# Altium PCB PCB1.PcbDoc (part 1 of 2)
Units mm, origin at the board's own origin, x right, y up, seen from the top; angles counter-clockwise.
Board outline 124.21 x 71.38 mm, 4 copper layers (Top Layer, Int1 (GND), Int2 (PWR), Bottom Layer), stack 1.369 mm thick; 127 components, 91 nets, 539 pads, 880 vias.
Unrouted connection lines stored in the file: 8.
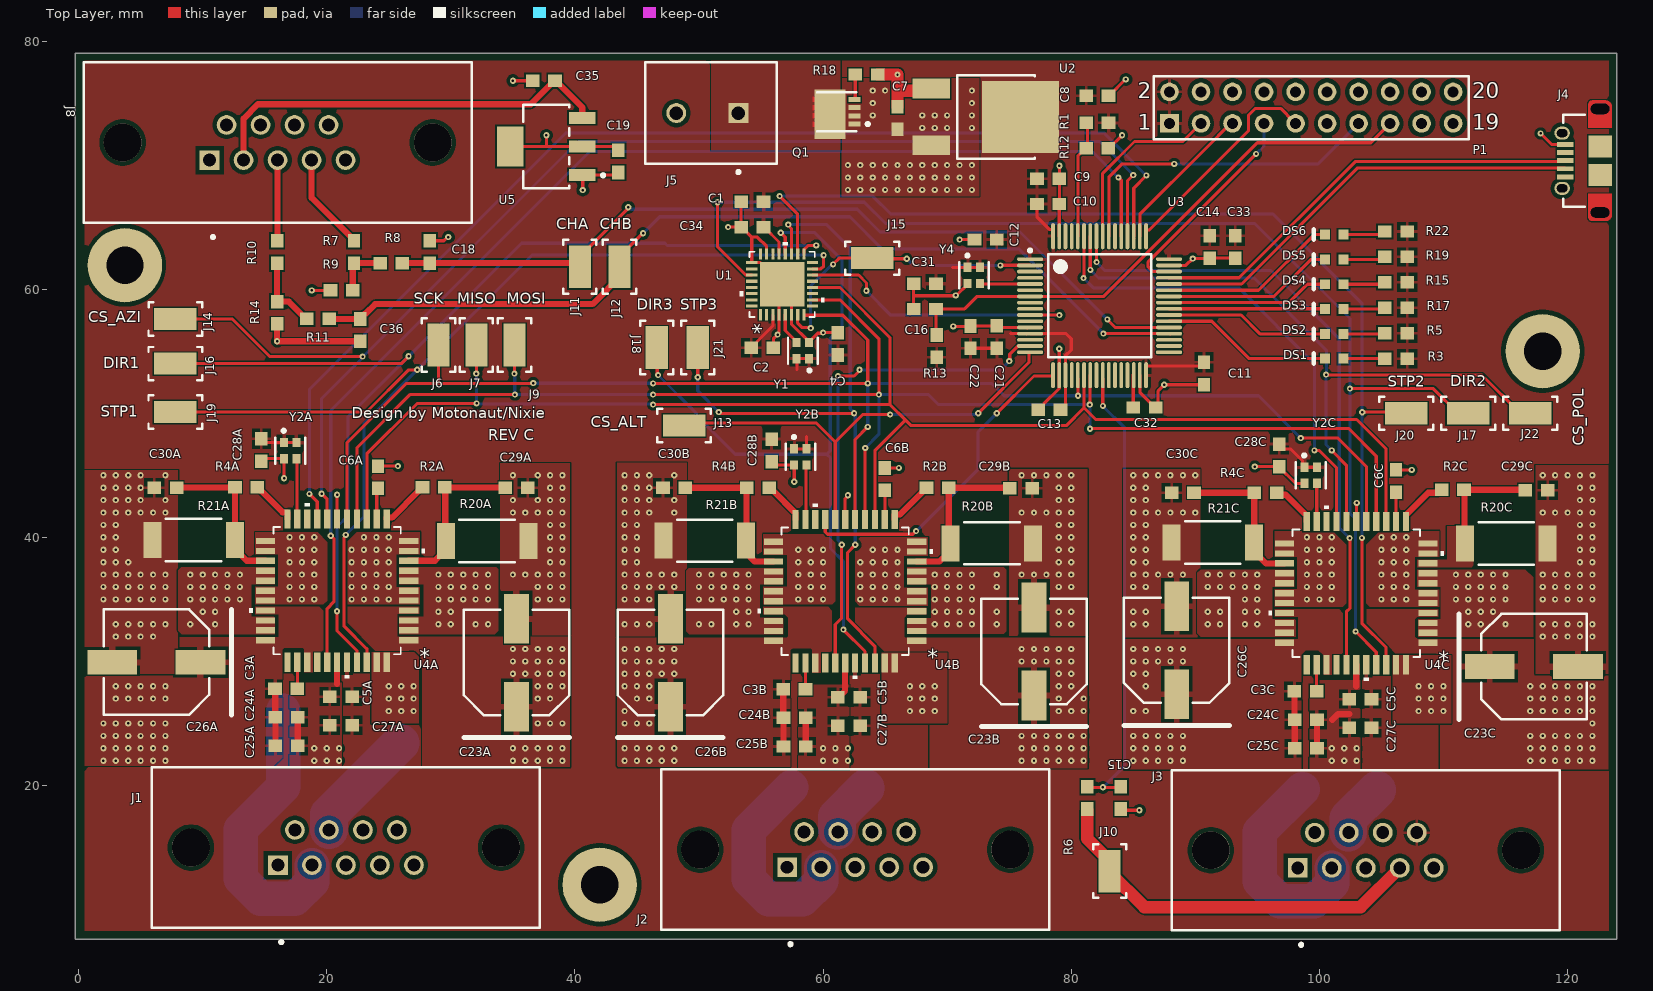
[diagram p0: Top Layer view]
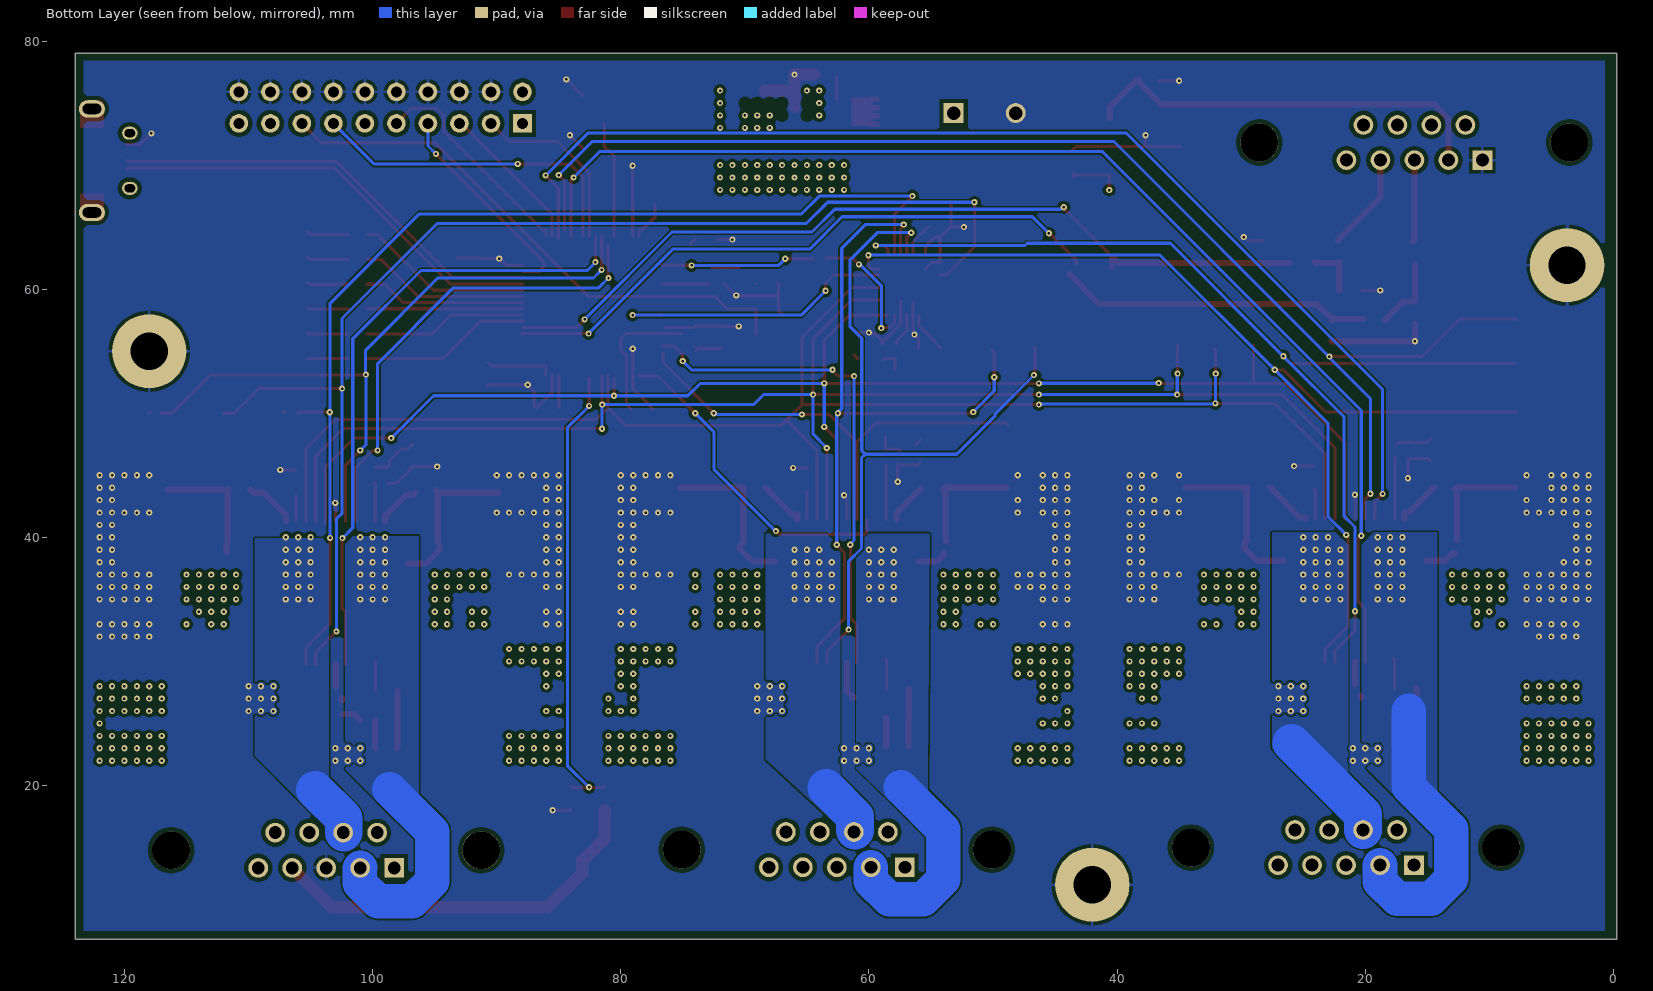
[diagram p1: Bottom Layer view, seen from below]
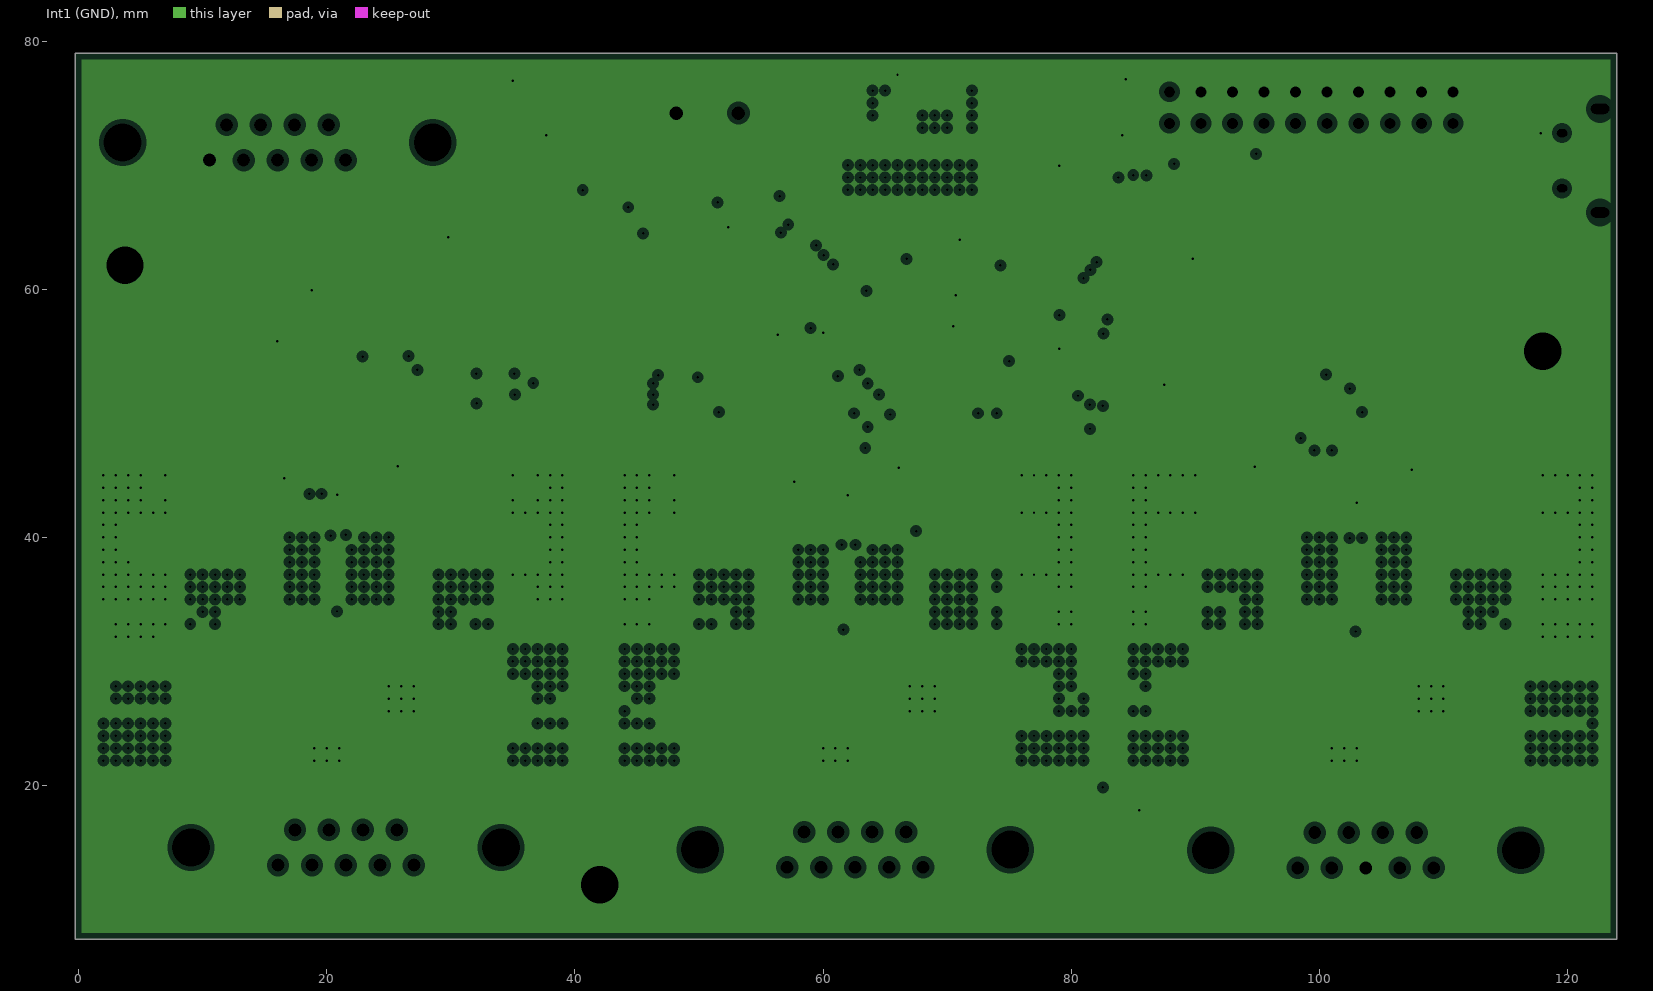
[diagram p2: Int1 (GND), clearances drawn from the general rule]
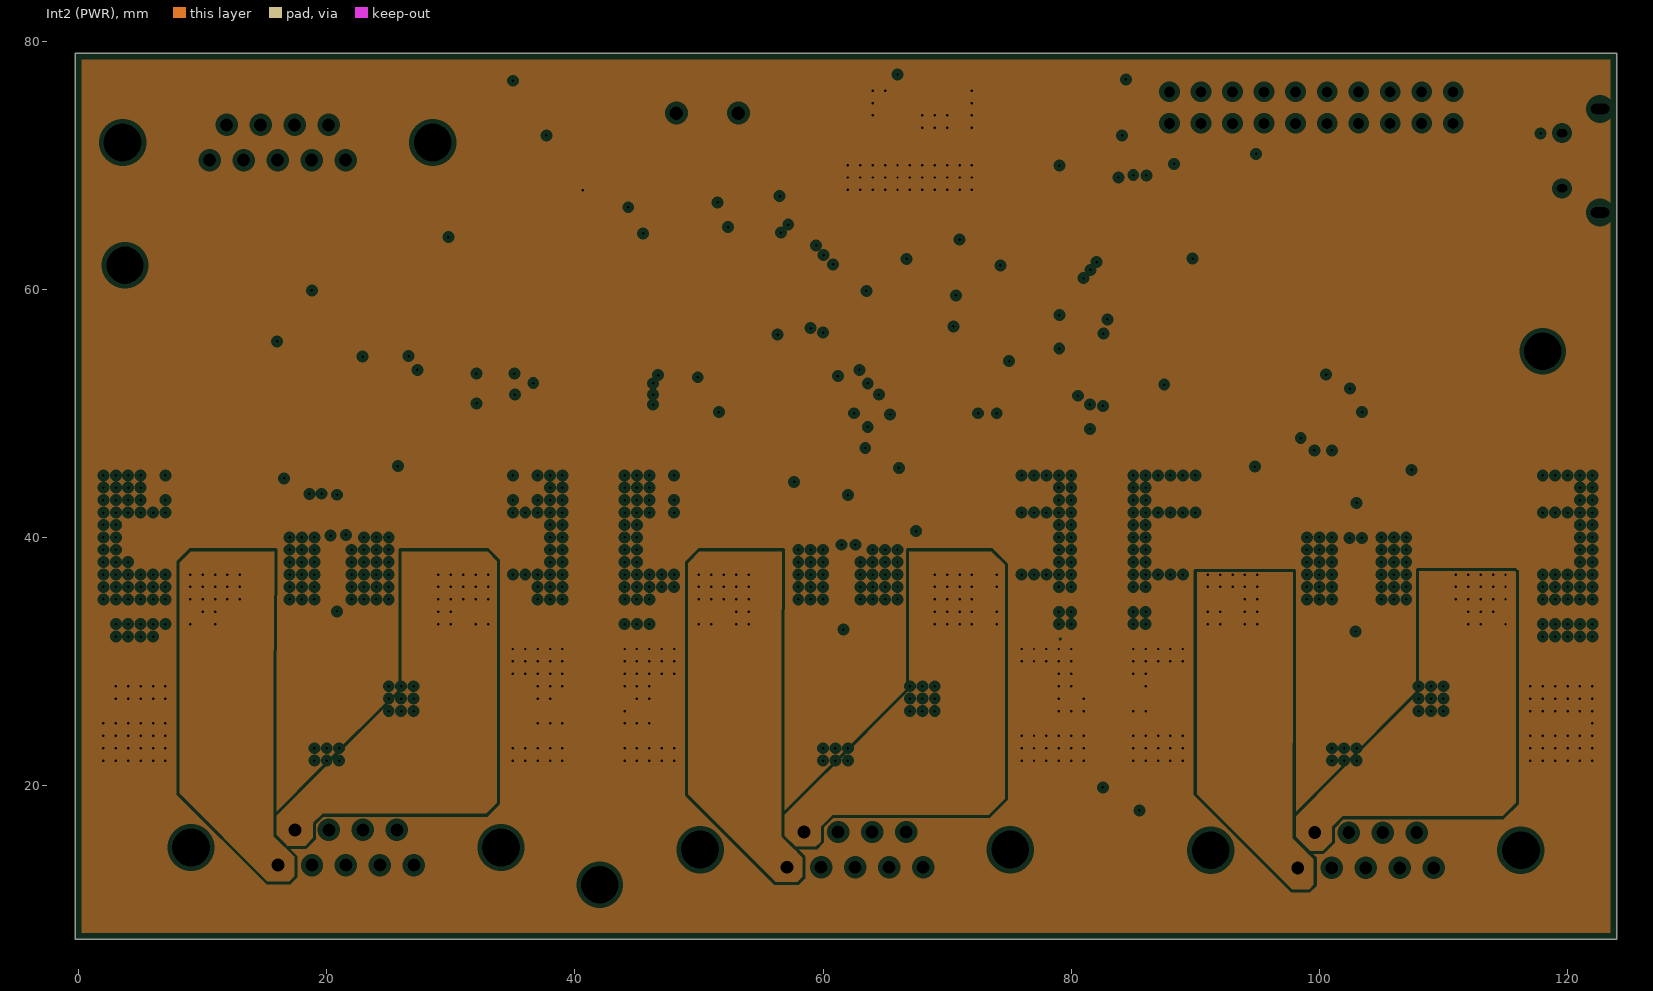
[diagram p3: Int2 (PWR), clearances drawn from the general rule]
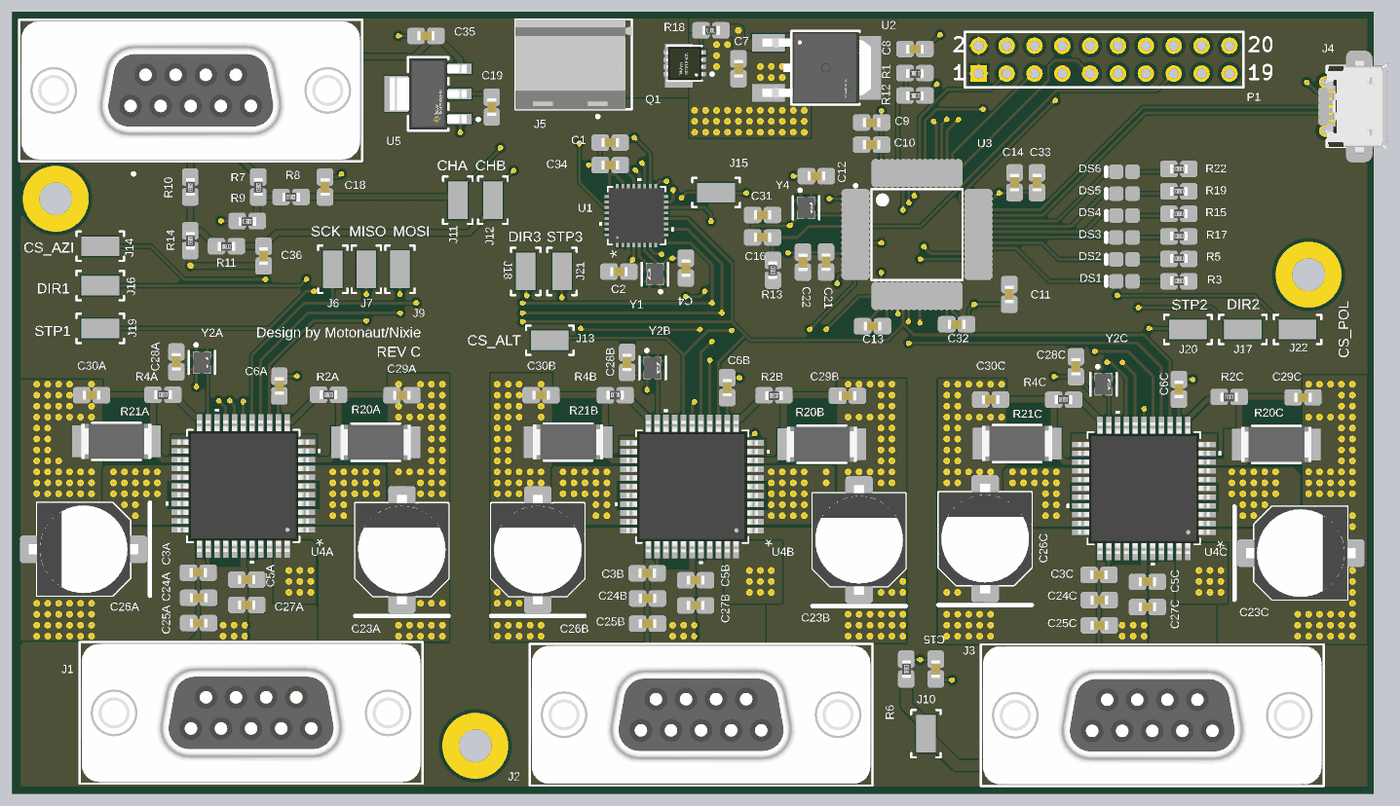
[diagram p5: 3D render of the assembled board from above, using the file's embedded part models]

## Layer stack, top to bottom
Top Solder: solder mask 0.0254, SM-001, Dk 4
Top Layer: signal copper 0.035
Dielectric 1: prepreg 0.1295, PP-017, Dk 4.3
Dielectric 2: prepreg 0.1295, PP-017, Dk 4.3
Int1 (GND): plane copper 0.035, net GND
Dielectric 3: core 0.7112, Core-039, Dk 4.8
Int2 (PWR): plane copper 0.035, net (Multiple Nets)
Dielectric 4: prepreg 0.1295, PP-017, Dk 4.3
Dielectric 5: prepreg 0.1295, PP-017, Dk 4.3
Bottom Layer: signal copper 0.035
Bottom Solder: solder mask 0.0254, SM-001, Dk 4

## Board outline
-0.254,7.62 123.952,7.62 123.952,79 -0.254,79

## Design rules (kind name [scope] priority, off if disabled: settings)
AcuteAngle [All] p1: minimum=6.00000000000000E+0001 checktracksonly=FALSE
Clearance [All] p1: gap=0.127 ignorepadtopadclearanceinfootprint=FALSE except(0.1: Arc-Arc Arc-Track Track-Track; 0.15: Arc-Text Track-Text SMDPad-Text THPad-Text Via-Text Fill-Text Poly-Text Region-Text Text-Text; 0.2: Arc-SMDPad Track-SMDPad; 0.254: Arc-Via Arc-Hole Track-Via Track-Hole SMDPad-THPad SMDPad-Via SMDPad-Hole Via-Via Via-Fill Via-Poly Via-Region Fill-Hole Poly-Hole Region-Hole Text-Hole; 0.33: Arc-THPad Track-THPad THPad-Via THPad-Fill THPad-Poly THPad-Region; 0.5: THPad-THPad THPad-Hole Via-Hole)
ComponentClearance [All] p1: gap=0 collisioncheckmode=3 verticalgap=0.254 showdistances=FALSE
DiffPairsRouting [All] p1: maxlimit=0.254 minlimit=0.254 mostfreqgap=0.254 toplayer_minwidth=0.254 toplayer_maxwidth=0.254 toplayer_prefwidth=0.254 bottomlayer_minwidth=0.254 bottomlayer_maxwidth=0.254 bottomlayer_prefwidth=0.254 maxuncoupledlength=12.7
HoleSize [All] p1: absolutevalues=TRUE maxlimit=7.62 minlimit=0.2 maxpercent=80.000 minpercent=20.000
MaxMinImpedance [InNetClass('USB')] p1: minimum=73,00 maximum=103,0
MinimumAnnularRing "MinimumAnnularRing Via" [IsVia] p1: minimumring=0.13
MinimumAnnularRing [All] p2: minimumring=0.3
MinimumSolderMaskSliver [All] p1: minsoldermaskwidth=0.2
PasteMaskExpansion [All] p1 off: expansion=0.254
PlaneClearance [All] p1: clearance=0.381
PlaneConnect [All] p1: pad.planeconnectstyle=Relief pad.reliefexpansion=0.508 pad.reliefentries=4 pad.reliefconductorwidth=0.254 pad.reliefairgap=0.254 via.planeconnectstyle=Direct via.reliefexpansion=0.508 via.reliefentries=4 via.reliefconductorwidth=0.254 via.reliefairgap=0.254
PolygonConnect [All] p1: thpad.connectstyle=Relief thpad.reliefconductorwidth=0.254 thpad.reliefentries=4 thpad.polygonreliefangle="90 Angle" thpad.airgapwidth=0.254 smdpad.connectstyle=Relief smdpad.reliefconductorwidth=0.254 smdpad.reliefentries=4 smdpad.polygonreliefangle="90 Angle" smdpad.airgapwidth=0.254 via.connectstyle=Direct via.reliefconductorwidth=0.254 via.reliefentries=4 via.polygonreliefangle="90 Angle" via.airgapwidth=0.254
RoomDefinition DRV3 [InComponentClass('DRV3')] p1 off: confinementstyle=ConfineIn formatcopy=TRUE lockcomponents=FALSE outline -189.586,-112.446 -138.786,-112.446 -138.786,-87.046 -189.586,-87.046
RoomDefinition DRV2 [InComponentClass('DRV2')] p2 off: confinementstyle=ConfineIn formatcopy=TRUE lockcomponents=FALSE outline -189.586,-112.446 -138.786,-112.446 -138.786,-87.046 -189.586,-87.046
RoomDefinition DRV1 [InComponentClass('DRV1')] p3 off: confinementstyle=ConfineIn formatcopy=TRUE lockcomponents=FALSE outline -189.586,-112.446 -138.786,-112.446 -138.786,-87.046 -189.586,-87.046
RoomDefinition Main [InComponentClass('Main')] p4 off: confinementstyle=ConfineIn formatcopy=TRUE lockcomponents=FALSE outline -189.586,-112.446 -138.786,-112.446 -138.786,-87.046 -189.586,-87.046
RoutingVias [All] p1: holewidth=0.25 width=0.5 viastyle="Through Hole" minholewidth=0.2 minwidth=0.5 maxholewidth=0.5 maxwidth=1
SMDNeckDown [All] p1: percent=100.000
SilkToSilkClearance [All] p1: silktosilkclearance=0.13
SilkToSolderMaskClearance SilkscreenOverComponentPads [IsPad] p1: minsilkscreentomaskgap=0.13 clearancetoexposedcopper=TRUE
SolderMaskExpansion [All] p1: expansion=0.05 istentingtop=FALSE
UnConnectedPin [All] p1 off:
UnRoutedNet [All] p1: checkbadconnections=TRUE
Width Width_1 [InNetClass('USB')] p1: maxlimit=0.097 minlimit=0.097 preferedwidth=0.097 impedanceprofiledriven=TRUE impedanceprofileid={384F65A2-4E45-46CB-9D77-96E8ADE9A7B7} impedanceprofilevalue=90.000000 minimp=50.000000 maximp=50.000000 favimp=50.000000
Width [All] p2: maxlimit=5 minlimit=0.254 preferedwidth=0.254 minimp=50.000000 maximp=50.000000 favimp=50.000000
20 further rules are at their usual default settings.

## Classes and differential pairs
net class USB: USB_D_N USB_D_P
differential pair class USB: USB_D
channel class Stepper-driver: DRV1 DRV2 DRV3
net class Power: NetJ1_1
net class Motor: NetJ1_1 NetJ1_2 NetJ1_6 NetJ1_7 NetJ2_1 NetJ2_2 NetJ2_6 NetJ2_7 NetJ3_1 NetJ3_2 NetJ3_6 NetJ3_7
component class Main: C1 C2 C4 C7 C8 C9 C10 C11 C12 C13 C14 C15 C16 C18 C19 C21 C22 C31 C32 C33 C34 C35 C36 DS1 DS2 DS3 DS4 DS5 DS6 J1 J2 J3 J4 J5 J6 J7 J8 J9 J10 J11 J12 J13 J14 J15 J16 J17 J18 J19 J20 J21 J22 P1 Q1 R1 R3 R5 R6 R7 R8 R9 R10 R11 R12 R13 R14 R15 R17 R18 R19 R22 U1 U2 U3 U5 Y1 Y4
component class DRV3: C3C C5C C6C C23C C24C C25C C26C C27C C28C C29C C30C R2C R4C R20C R21C U4C Y2C
component class DRV2: C3B C5B C6B C23B C24B C25B C26B C27B C28B C29B C30B R2B R4B R20B R21B U4B Y2B
component class DRV1: C3A C5A C6A C23A C24A C25A C26A C27A C28A C29A C30A R2A R4A R20A R21A U4A Y2A
differential pair USB_D: +USB_D_P -USB_D_N

## Components (designator, comment, footprint, x,y, rotation, side; value= is the part's Value field where it differs from the comment)
C1 "Cap SMD" "C0603 (1608)" 54.3,67.05 r0 top value=1uF
C2 "Cap SMD" "C0603 (1608)" 55.1,55.28 r180 top value=100nF
C3A "Cap SMD" "C0603 (1608)" 16.734,27.803 r0 top value=100nF (schematic designator C3)
C3B "Cap SMD" "C0603 (1608)" 57.679,27.752 r0 top value=100nF (schematic designator C3)
C3C "Cap SMD" "C0603 (1608)" 98.878,27.599 r0 top value=100nF (schematic designator C3)
C4 "Cap SMD" "C0603 (1608)" 61.2,55.6 r270 top value=100nF
C5A "Cap SMD" "C0603 (1608)" 21.152,27.163 r0 top value=100nF (schematic designator C5)
C5B "Cap SMD" "C0603 (1608)" 62.097,27.112 r0 top value=100nF (schematic designator C5)
C5C "Cap SMD" "C0603 (1608)" 103.295,26.96 r0 top value=100nF (schematic designator C5)
C6A "Cap SMD" "C0603 (1608)" 24.13,44.842 r270 top value=470nF (schematic designator C6)
C6B "Cap SMD" "C0603 (1608)" 64.973,44.691 r270 top value=470nF (schematic designator C6)
C6C "Cap SMD" "C0603 (1608)" 106.172,44.538 r270 top value=470nF (schematic designator C6)
C7 "Cap SMD" "C0603 (1608)" 66,73.8 r270 top value=22uF
C8 "Cap SMD" "C0603 (1608)" 82.1,75.6 r180 top value=22uF
C9 "Cap SMD" "C0603 (1608)" 78.148,68.898 r180 top value=4.7uF
C10 "Cap SMD" "C0603 (1608)" 78.148,66.867 r180 top value=100nF
C11 "Cap SMD" "C0603 (1608)" 90.7,53.2 r90 top value=100nF
C12 "Cap SMD" "C0603 (1608)" 73.1,64 r0 top value=100nF
C13 "Cap SMD" "C0603 (1608)" 78.232,50.292 r0 top value=100nF
C14 "Cap SMD" "C0603 (1608)" 91.178,63.4 r90 top value=100nF
C15 "Cap SMD" "C0603 (1608)" 84,19 r90 top value=3nF
C16 "Cap SMD" "C0603 (1608)" 68.199,58.402 r0 top value=100nF
C18 "Cap SMD" "C0603 (1608)" 28.3,63 r270 top value=100nF
C19 "Cap SMD" "C0603 (1608)" 43.5,70.3 r270 top value=100nF
C21 "Cap SMD" "C0603 (1608)" 73.987,56.148 r270 top value=100nF
C22 "Cap SMD" "C0603 (1608)" 71.882,56.134 r270 top value=1uF
C23A "EEEFK1C471P" PNSC-FK-V-F_V 35.3,29.9 r90 top (schematic designator C23)
C23B "EEEFK1C471P" PNSC-FK-V-F_V 77,30.8 r90 top (schematic designator C23)
C23C "EEEFK1C471P" PNSC-FK-V-F_V 117.289,29.585 r0 top (schematic designator C23)
C24A "Cap SMD" "C0603 (1608)" 16.764,25.498 r0 top value=1uF (schematic designator C24)
C24B "Cap SMD" "C0603 (1608)" 57.709,25.448 r0 top value=1uF (schematic designator C24)
C24C "Cap SMD" "C0603 (1608)" 98.908,25.295 r0 top value=1uF (schematic designator C24)
C25A "Cap SMD" "C0603 (1608)" 16.764,23.194 r0 top value=100nF (schematic designator C25)
C25B "Cap SMD" "C0603 (1608)" 57.709,23.143 r0 top value=100nF (schematic designator C25)
C25C "Cap SMD" "C0603 (1608)" 98.908,22.991 r0 top value=100nF (schematic designator C25)
C26A "EEEFK1C471P" PNSC-FK-V-F_V 6.277,29.935 r180 top (schematic designator C26)
C26B "EEEFK1C471P" PNSC-FK-V-F_V 47.7,29.9 r90 top (schematic designator C26)
C26C "EEEFK1C471P" PNSC-FK-V-F_V 88.5,30.9 r90 top (schematic designator C26)
C27A "Cap SMD" "C0603 (1608)" 21.152,24.859 r0 top value=1uF (schematic designator C27)
C27B "Cap SMD" "C0603 (1608)" 62.097,24.808 r0 top value=1uF (schematic designator C27)
C27C "Cap SMD" "C0603 (1608)" 103.295,24.655 r0 top value=1uF (schematic designator C27)
C28A "Cap SMD" "C0603 (1608)" 14.732,47.044 r90 top value=100nF (schematic designator C28)
C28B "Cap SMD" "C0603 (1608)" 55.849,46.993 r90 top value=100nF (schematic designator C28)
C28C "Cap SMD" "C0603 (1608)" 96.774,46.598 r90 top value=100nF (schematic designator C28)
C29A "Cap SMD" "C0603 (1608)" 35.3,44 r180 top value=470nF (schematic designator C29)
C29B "Cap SMD" "C0603 (1608)" 75.946,43.942 r180 top value=470nF (schematic designator C29)
C29C "Cap SMD" "C0603 (1608)" 117.5,43.8 r180 top value=470nF (schematic designator C29)
C30A "Cap SMD" "C0603 (1608)" 7,44 r0 top value=470nF (schematic designator C30)
C30B "Cap SMD" "C0603 (1608)" 48,44 r0 top value=470nF (schematic designator C30)
C30C "Cap SMD" "C0603 (1608)" 89,43.6 r0 top value=470nF (schematic designator C30)
C31 "Cap SMD" "C0603 (1608)" 68.199,60.452 r0 top value=100nF
C32 "Cap SMD" "C0603 (1608)" 85.9,50.466 r180 top value=4.7uF
C33 "Cap SMD" "C0603 (1608)" 93.228,63.4 r90 top value=100nF
C34 "Cap SMD" "C0603 (1608)" 54.3,65 r0 top value=100nF
C35 "Cap SMD" "C0603 (1608)" 37.5,76.8 r0 top value=100nF
C36 "Cap SMD" "C0603 (1608)" 22.7,56.7 r90 top value=100nF
DS1 "HSMG-C190" AVAG-HSMX-C190_V 101.195,54.4 r180 top
DS2 "HSMG-C190" AVAG-HSMX-C190_V 101.195,56.4 r180 top
DS3 "HSMG-C190" AVAG-HSMX-C190_V 101.195,58.4 r180 top
DS4 "HSMG-C190" AVAG-HSMX-C190_V 101.195,60.4 r180 top
DS5 "HSMG-C190" AVAG-HSMX-C190_V 101.195,62.4 r180 top
DS6 "HSMG-C190" AVAG-HSMX-C190_V 101.195,64.4 r180 top
J1 "1-5747150-6" FP-1-5747150-6-MFG 21.552,15 r180 top
J2 "1-5747150-6" FP-1-5747150-6-MFG 62.591,14.831 r180 top
J3 "1-5747150-6" FP-1-5747150-6-MFG 103.745,14.78 r180 top
J4 "629105150921" 629105150921 122.625,70.355 r90 top
J5 "282836-2" TECO-282836-2_V 50.674,74.191 r180 top
J6 "5015" FP-5015-MFG 29,55.5 r90 top
J7 "5015" FP-5015-MFG 32.057,55.5 r90 top
J8 "1-5747150-6" FP-1-5747150-6-MFG 16.045,71.82 r180 top
J9 "5015" FP-5015-MFG 35.125,55.501 r270 top
J10 "5015" FP-5015-MFG 83.1,13.1 r90 top
J11 "5015" FP-5015-MFG 40.4,61.8 r90 top
J12 "5015" FP-5015-MFG 43.6,61.8 r90 top
J13 "5015" FP-5015-MFG 48.799,49.015 r180 top
J14 "5015" FP-5015-MFG 7.801,57.6 r180 top
J15 "5015" FP-5015-MFG 63.957,62.5 r0 top
J16 "5015" FP-5015-MFG 7.8,54 r0 top
J17 "5015" FP-5015-MFG 112,50 r0 top
J18 "5015" FP-5015-MFG 46.6,55.3 r90 top
J19 "5015" FP-5015-MFG 7.8,50.1 r0 top
J20 "5015" FP-5015-MFG 107,50 r0 top
J21 "5015" FP-5015-MFG 49.9,55.3 r90 top
J22 "5015" FP-5015-MFG 117,50 r0 top
P1 "Header 10X2" HDR2X10 87.92,73.36 r0 top
Q1 "SI7615ADN-T1-GE3" FP-S16-2667_SINGLE-MFG 61.1,74.3 r180 top
R1 "10K" "R0603 (1608)" 82.1,73.4 r0 top
R2A "Res" "R0603 (1608)" 28.615,44.045 r0 top (schematic designator R2)
R2B "Res" "R0603 (1608)" 69.24,43.995 r0 top (schematic designator R2)
R2C "Res" "R0603 (1608)" 110.758,43.842 r0 top (schematic designator R2)
R3 "1K" "R0603 (1608)" 106.172,54.4 r180 top
R4A "Res" "R0603 (1608)" 13.513,44.044 r180 top (schematic designator R4)
R4B "Res" "R0603 (1608)" 54.762,43.993 r180 top (schematic designator R4)
R4C "Res" "R0603 (1608)" 95.656,43.588 r180 top (schematic designator R4)
R5 "1K" "R0603 (1608)" 106.172,56.45 r180 top
R6 "10K" "R0603 (1608)" 81.3,19 r90 top
R7 "10K" "R0603 (1608)" 22.2,63 r90 top
R8 "10K" "R0603 (1608)" 25.2,62.1 r0 top
R9 "10K" "R0603 (1608)" 21.2,59.9 r0 top
R10 "10K" "R0603 (1608)" 16,63 r90 top
R11 "10K" "R0603 (1608)" 19.3,57.6 r0 top
R12 "10K" "R0603 (1608)" 82.098,71.349 r0 top
R13 "10K" "R0603 (1608)" 69.149,55.401 r270 top
R14 "10K" "R0603 (1608)" 16,58.1 r90 top
R15 "1K" "R0603 (1608)" 106.172,60.55 r180 top
R17 "1K" "R0603 (1608)" 106.172,58.5 r180 top
R18 "1K" "R0603 (1608)" 63.5,77.3 r180 top
R19 "1K" "R0603 (1608)" 106.172,62.601 r180 top
R20A "ERJ-1TRQFR22U" FP-ERJ1TR-MFG 32.921,39.705 r0 top value=0.22Ω (schematic designator R20)
R20B "ERJ-1TRQFR22U" FP-ERJ1TR-MFG 73.611,39.522 r0 top value=0.22Ω (schematic designator R20)
R20C "ERJ-1TRQFR22U" FP-ERJ1TR-MFG 115.064,39.502 r0 top value=0.22Ω (schematic designator R20)
R21A "ERJ-1TRQFR22U" FP-ERJ1TR-MFG 9.269,39.787 r180 top value=0.22Ω (schematic designator R21)
R21B "ERJ-1TRQFR22U" FP-ERJ1TR-MFG 50.468,39.726 r180 top value=0.22Ω (schematic designator R21)
R21C "ERJ-1TRQFR22U" FP-ERJ1TR-MFG 91.413,39.584 r180 top value=0.22Ω (schematic designator R21)
R22 "1K" "R0603 (1608)" 106.172,64.651 r180 top
U1 "TMC429-LI" QFN32_5X5_TRI-M 56.704,60.388 r90 top
U2 "NCP1117DT33G" FP-369C-MFG 73.115,73.885 r270 top
U3 "STM32F401RCT6" STM-LQFP64_M 82.284,58.666 r0 top
U4A "TMC2660-PA" LQFP44_12X12_TRI-M 20.834,35.705 r180 top (schematic designator U4)
U4B "TMC2660-PA" LQFP44_12X12_TRI-M 61.779,35.654 r180 top (schematic designator U4)
U4C "TMC2660-PA" LQFP44_12X12_TRI-M 102.978,35.502 r180 top (schematic designator U4)
U5 "LM7805MPX/NOPB" FP-LM7805MPX-NOPB-MFG 37.7,71.5 r180 top
Y1 "ASA-16.000MHZ-L-T" FP-ASA-MFG 58.375,55.05 r90 top
Y2A "ASA-16.000MHZ-L-T" FP-ASA-MFG 17.057,46.99 r270 top (schematic designator Y2)
Y2B "ASA-16.000MHZ-L-T" FP-ASA-MFG 58.174,46.482 r270 top (schematic designator Y2)
Y2C "ASA-16.000MHZ-L-T" FP-ASA-MFG 99.3,45 r270 top (schematic designator Y2)
Y4 "ASA-16.000MHZ-L-T" FP-ASA-MFG 72.157,61.107 r270 top

## Footprints (in the part's own frame and the unit in brackets; to place one, negate y for a bottom-side part, rotate by r counter-clockwise, add the part's x,y. Pads: shape width x height; smd on the part's side, far side on the other; paste and mask are expansions set on the pad)
629105150921 [mm] "Micro USB 2.0 Type AB Horizontal"
  rect 0.4x1.35 smd: 1(-1.3,2.805) 2(-0.65,2.805) 3(0,2.805) 4(0.65,2.805) 5(1.3,2.805)
  round 0 / inner oval 1.4x2.1 / far side oval 1.4x2.1 hole 0.825 slot 1.5 at 90 deg mask+0.102: Shell(-4.175,0)
  oval 1.05x1.25 hole 0.65 slot 0.85 at 90 deg: Shell(-2.225,3.055) Shell(2.225,3.055)
  rect 1.8x1.9 smd: Shell(-1.15,0) Shell(1.15,0)
  round 0 / inner round 0 / far side oval 1.4x2.1 hole 0.825 slot 1.5 at 90 deg mask+0.102: Shell(4.175,0)
  Top Layer region: -4.353,-0.95 -4.544,-0.912 -4.706,-0.804 -4.814,-0.641 -4.852,-0.45 -4.852,-0.45 -4.852,0.65 -4.83,0.765 -4.765,0.862 -4.667,0.927 -4.553,0.95 -4.553,0.95 -2.668,0.95 -2.668,-0.95
  Top Layer region: 4.353,-0.95 4.544,-0.912 4.706,-0.804 4.814,-0.641 4.852,-0.45 4.852,-0.45 4.852,0.65 4.83,0.765 4.765,0.862 4.667,0.927 4.553,0.95 4.553,0.95 2.668,0.95 2.668,-0.95
  silkscreen extent -3.7,1.25 3.7,2.97, body extent -4.3,-2.64 4.3,3.23, height 2.76
AVAG-HSMX-C190_V [mm] "SMD, 2-Leads, Body 1.6x0.8mm, Height 0.9mm"
  rect 0.8x0.8 smd: 1(-0.75,0) 2(0.75,0)
  silkscreen extent 1.65,-0.4 1.65,0.4, body extent -0.8,-0.4 0.8,0.4, height 0.9
"C0603 (1608)" [mm] "Chip Capacitor, 2-Leads, Body 1,60x0,81mm, IPC Low Density"
  rect 1.1x1 smd: 1(-0.9,0) 2(0.9,0)
  body extent -0.8,-0.41 0.8,0.42, height 0.79
FP-1-5747150-6-MFG [mm]
  rect 1.59x1.59 hole 1.04 paste-1000 mask+0: 1(5.485,1.42)
  round 1.59 hole 1.04 paste-1000 mask+0: 2(2.745,1.42) 3(0.005,1.42) 4(-2.735,1.42) 5(-5.475,1.42) 6(4.115,-1.42) 7(1.375,-1.42) 8(-1.365,-1.42) 9(-4.105,-1.42)
  round 3.05 hole 3.05 unplated paste-1000 mask+0: ""(-12.495,0) ""(12.495,0)
  silkscreen extent -15.64,-6.47 15.64,7.74, body extent -15.74,-6.57 15.74,6.57, height 0.25
FP-369C-MFG [mm]
  rect 1.6x3 smd paste+0 mask+0: 1(-2.285,-4.39) 3(2.285,-4.39)
  rect 5.8x6.2 smd paste+0 mask+0: 4(0,2.79)
  silkscreen extent -3.36,-2.28 3.36,3.94, body extent -3.46,-5.99 3.46,5.99, height 0.25
FP-5015-MFG [mm]
  rect 3.43x1.78 smd paste+0 mask+0: 1(0,0)
  silkscreen extent -2.16,-1.34 2.17,1.34
FP-ASA-MFG [mm]
  rect 0.75x0.65 smd paste+0 mask+0: 1(-0.65,-0.5) 2(0.65,-0.5) 3(0.65,0.5) 4(-0.65,0.5)
  silkscreen extent -1.72,-1.2 1.05,1.2, body extent -1.15,-0.95 1.15,0.95, height 0.25
FP-ERJ1TR-MFG [mm]
  rect 1.45x2.9 smd paste+0 mask+0: 1(-3.325,0) 2(3.325,0)
  silkscreen extent -2.22,-1.7 2.22,1.7, body extent -4.15,-1.8 4.15,1.8, height 0.25
FP-LM7805MPX-NOPB-MFG [mm]
  rect 2.15x0.95 smd paste+0 mask+0: 1(-2.9,2.3) 2(-2.9,0) 3(-2.9,-2.3)
  rect 2.15x3.25 smd paste+0 mask+0: 4(2.9,0)
  silkscreen extent -4.7,-3.35 1.85,3.35, body extent -4.08,-3.45 4.08,3.45, height 0.25
FP-S16-2667_SINGLE-MFG [mil]
  rect 39x16 smd paste+0 mask+0: 1(-56.5,39) 2(-56.5,13) 3(-56.5,-13) 4(-56.5,-39)
  rect 98.43x157.48 smd paste+0 mask+0: 5-6-7-8(21,8)
  Top Layer region: -12,44 46,44 46,47 76,47 76,31 56,31 56,21 76,21 76,5 56,5 56,-5 76,-5 76,-21 56,-21 56,-31 76,-31 76,-47 46,-47 46,-44 -12,-44
  silkscreen extent -103,-62 62,62, body extent -80,-71 80,71, height 10
HDR2X10 [mm] "Connector; Header; 10x2 Position"
  rect 1.5x1.5 hole 0.9: 1(0,0)
  round 1.5 hole 0.9: 2(0,2.54) 3(2.54,0) 4(2.54,2.54) 5(5.08,0) 6(5.08,2.54) 7(7.62,0) 8(7.62,2.54) 9(10.16,0) 10(10.16,2.54) 11(12.7,0) 12(12.7,2.54) 13(15.24,0) 14(15.24,2.54) 15(17.78,0) 16(17.78,2.54) 17(20.32,0) 18(20.32,2.54) 19(22.86,0) 20(22.86,2.54)
  silkscreen extent -1.27,-1.27 24.13,3.81
LQFP44_12X12_TRI-M [mil]
  rect 61x20 smd paste+0 mask+0: 1(-227.5,157.48) 2(-227.5,125.98) 3(-227.5,94.49) 4(-227.5,62.99) 5(-227.5,31.5) 6(-227.5,0) 7(-227.5,-31.5) 8(-227.5,-62.99) 9(-227.5,-94.49) 10(-227.5,-125.98) 11(-227.5,-157.48) 23(227.5,-157.48) 24(227.5,-125.98) 25(227.5,-94.49) 26(227.5,-62.99) 27(227.5,-31.5) 28(227.5,0) 29(227.5,31.5) 30(227.5,62.99) 31(227.5,94.49) 32(227.5,125.98) 33(227.5,157.48)
  rect 20x61 smd paste+0 mask+0: 12(-157.48,-227.5) 13(-125.98,-227.5) 14(-94.49,-227.5) 15(-62.99,-227.5) 16(-31.5,-227.5) 17(0,-227.5) 18(31.5,-227.5) 19(62.99,-227.5) 20(94.49,-227.5) 21(125.98,-227.5) 22(157.48,-227.5) 34(157.48,227.5) 35(125.98,227.5) 36(94.49,227.5) 37(62.99,227.5) 38(31.5,227.5) 39(0,227.5) 40(-31.5,227.5) 41(-62.99,227.5) 42(-94.49,227.5) 43(-125.98,227.5) 44(-157.48,227.5)
  silkscreen extent -278,-278 278,278, body extent -236,-236 236,236, height 63
PNSC-FK-V-F_V [mm] "CAPAE, 2-Leads, Body 8.50x8.50mm"
  rect 4x2 smd: 1(-3.55,0) 2(3.55,0)
  silkscreen extent -6.05,-4.25 4.25,4.25, body extent -5,-4.25 5,4.25, height 10.5
QFN32_5X5_TRI-M [mm]
  rect 0.908x0.255 smd paste+0 mask+0: 1(-2.448,1.75) 2(-2.448,1.25) 3(-2.448,0.75) 4(-2.448,0.25) 5(-2.448,-0.25) 6(-2.448,-0.75) 7(-2.448,-1.25) 8(-2.448,-1.75) 17(2.448,-1.75) 18(2.448,-1.25) 19(2.448,-0.75) 20(2.448,-0.25) 21(2.448,0.25) 22(2.448,0.75) 23(2.448,1.25) 24(2.448,1.75)
  rect 0.255x0.908 smd paste+0 mask+0: 9(-1.75,-2.448) 10(-1.25,-2.448) 11(-0.75,-2.448) 12(-0.25,-2.448) 13(0.25,-2.448) 14(0.75,-2.448) 15(1.25,-2.448) 16(1.75,-2.448) 25(1.75,2.448) 26(1.25,2.448) 27(0.75,2.448) 28(0.25,2.448) 29(-0.25,2.448) 30(-0.75,2.448) 31(-1.25,2.448) 32(-1.75,2.448)
  rect 3.607x3.607 smd paste+0 mask+0: 33(0,0)
  silkscreen extent -2.63,-3.41 3.41,3.41, body extent -2.5,-2.5 2.5,2.5, height 0.99
"R0603 (1608)" [mm]
  rect 1.1x1 smd: 1(-0.9,0) 2(0.9,0)
  body extent -0.8,-0.42 0.8,0.38, height 0.45
STM-LQFP64_M [mm] "Thin QFP, 64-Leads, Body 10x10mm, Pitch 0.5mm, IPC Low Density"
  oval 2.1x0.3 smd: 1(-5.6,3.75) 2(-5.6,3.25) 3(-5.6,2.75) 4(-5.6,2.25) 5(-5.6,1.75) 6(-5.6,1.25) 7(-5.6,0.75) 8(-5.6,0.25) 9(-5.6,-0.25) 10(-5.6,-0.75) 11(-5.6,-1.25) 12(-5.6,-1.75) 13(-5.6,-2.25) 14(-5.6,-2.75) 15(-5.6,-3.25) 16(-5.6,-3.75) 33(5.6,-3.75) 34(5.6,-3.25) 35(5.6,-2.75) 36(5.6,-2.25) 37(5.6,-1.75) 38(5.6,-1.25) 39(5.6,-0.75) 40(5.6,-0.25) 41(5.6,0.25) 42(5.6,0.75) 43(5.6,1.25) 44(5.6,1.75) 45(5.6,2.25) 46(5.6,2.75) 47(5.6,3.25) 48(5.6,3.75)
  oval 0.3x2.1 smd: 17(-3.75,-5.6) 18(-3.25,-5.6) 19(-2.75,-5.6) 20(-2.25,-5.6) 21(-1.75,-5.6) 22(-1.25,-5.6) 23(-0.75,-5.6) 24(-0.25,-5.6) 25(0.25,-5.6) 26(0.75,-5.6) 27(1.25,-5.6) 28(1.75,-5.6) 29(2.25,-5.6) 30(2.75,-5.6) 31(3.25,-5.6) 32(3.75,-5.6) 49(3.75,5.6) 50(3.25,5.6) 51(2.75,5.6) 52(2.25,5.6) 53(1.75,5.6) 54(1.25,5.6) 55(0.75,5.6) 56(0.25,5.6) 57(-0.25,5.6) 58(-0.75,5.6) 59(-1.25,5.6) 60(-1.75,5.6) 61(-2.25,5.6) 62(-2.75,5.6) 63(-3.25,5.6) 64(-3.75,5.6)
  silkscreen extent -5.72,-4.15 4.15,4.57, body extent -5,-5 5,5, height 1.6
TECO-282836-2_V [mm] "Female Header, Pitch 5mm, 1 x 2 Position, Height 10mm"
  rect 1.6x1.6 hole 1.1: 1(-2.5,0)
  round 1.6 hole 1.1: 2(2.5,0)
  silkscreen extent -5.6,-4.1 5,4.87, body extent -5.6,-4.1 5,4.1, height 10

## Part data
C23A C23B C23C C26A C26B C26C: library part CMP-2000-06204-1, "Aluminum Electrolytic Capacitor, 470 uF, +/- 20%, 16 V, 2-Pin SMD (Size Code F), -55 to 105 degC, RoHS, Tape and Reel", Capacitance=470µF, Case Size/Dimension=Ø8x10.2mm, Lifetime@Temperature=2000Hrs@105°C, Manufacturer=Panasonic, Operating Temp Range=-55to+105°C, Operating Temp-Max=105°C, Package Description="2-Pin Electrolytic Aluminum Capacitor, Body 8.3 x 8.3 mm", Package Reference=FK-V-F, Rated Voltage=16V, Ripple Current=600mA, Datasheet URL=http://industrial.panasonic.com/cdbs/www-data/pdf/RDE0000/ABA0000C1181.pdf, Datasheet Version=03/2016, Impedance=0.16O, Manufacturer URL=http://www.panasonic.com/, Mounting Technology=SurfaceMount, Package URL=http://industrial.panasonic.com/cdbs/www-data/pdf/RDE0000/DME0000COL48.pdf, Series=FK, Type=Can
DS1 DS2 DS3 DS4 DS5 DS6: library part CMP-1744-00002-1, "Chip LED, Green, 2.2 V, -40 to 85 degC, 2-Pin SMD, RoHS, Tape and Reel", Case\Package=SOIC, Clock Frequency="100 KHz", Frequency="400 KHz", Max Operating Temperature="85 degC", Max Supply Voltage="5.5 V", Min Operating Temperature="-40 degC", Min Supply Voltage="1.7 V", Nominal Supply Current="2 mA", Package Quantity=3000, Access Time="3500 ns", ComponentLink1Description="Manufacturer URL", ComponentLink1URL=http://www.avagotech.com/, ComponentLink2Description=Datasheet, ComponentLink2URL=http://docs.avagotech.com/docs/AV02-0551EN, ComponentLink3Description="Package Specification", ComponentLink3URL=http://www.fairchildsemi.com/dwg/MA/MA03D.pdf, DatasheetVersion=Mar-12, Density="32 kb", Height="1.5 mm", Interface=Serial, Length="5 mm", Max Clock Frequency="100 KHz", Mount="Surface Mount", PackageDescription="2-Pin Surface Mount Device, Body 1.6 x 0.8 mm, Height 0.9 mm", PackageReference=HSMX-C190, Packaging="Tape and Reel", Pins=8, Radiation Hardening=No, REACH SVHC="No SVHC", RoHSCompliant=true, Width="4 mm"
J1 J2 J3 J8: library part CMP-03367-000009-1, "CONN D-SUB RCPT 9POS VERT SOLDER", Current Rating=6A, Manufacturer="TE Connectivity", Temperature="-55°C to +105°C", Temperature Range High=+105°C, Temperature Range Low=-55°C, Automotive=No, Category=Conn, ComponentLink2Description=Datasheet, ComponentLink2URL=https://www.te.com/usa-en/product-1-5747150-6.html?te_bu=Cor&te_type=other&te_campaign=oct_glo_cor-oct-global-oth-prtnr-fy19-oct-octo-buy-bom_sma-298_2&elqCampaignId=35216, Conn Gender=Female, Conn Orientation=Vertical, Contact Material=Gold,Nickel, Device Class L1=Connectors, Device Class L2="D-Sub Connectors", Device Class L3=unset, Digikey Description="CONN D-SUB RCPT 9POS VERT SOLDER", Height=12.54mm, Is Female=yes, Lead Free=Yes, Manufacturer Part Number=1-5747150-6, Mouser Description="D-Sub Standard Connectors RECP FRNT MTL SHL 9P female screwlocks", Number of contacts=9, Octopart=https://octopart.com/1-5747150-6-te+connectivity-39500344, Package=1-5747150-6, Pitch=2.74mm, RoHS=TRUE, Shielding=false
J4: library part CMP-1502-03249-1, "Micro USB 2.0 Type AB Receptacle WR-COM, Horizontal, SMT", Contact Resistance=30mOhm, Manufacturer="Wurth Elektronik", Operating Temperature=-40to85degC, Rated Current=1.8A, Working Voltage=30VAC, Connector Type=MicroUSB2.0TypeAB, Datasheet URL=https://katalog.we-online.de/em/datasheet/629105150921.pdf, Gender=Receptacle, Manufacturer URL=http://www.we-online.de, Mounting Technology=SMT, Orientation=Horizontal, Package Reference=629105150921, Packaging=TapeandReel, Part Number=629105150921, Publisher=WurthElektronik
J5: library part CMP-1684-00017-1, "Female Header, Pitch 5 mm, 1 x 2 Position, Height 10 mm, Tail Length 3.5 mm, Rohs, Bulk", Color=Green, Current=13.5A, Manufacturer="TE Connectivity", Package Description="Female Header, Pitch 5 mm, 1 x 2 Position, Height 10 mm, Tail Length 3.5 mm", Package Reference=THD, Standard Package=300, Voltage=300V, 3D Model=282836-2.pdf, Category=Connectors,Interconnects, Clamp Material - Plating=Brass-NickelPlated, Contact Material - Plating=Brass-TinPlated, Datasheet URL=http://www.te.com.cn/commerce/DocumentDelivery/DDEController?Action=showdoc&DocId=Catalog+Section%7F1308389_EUROSTYLE_TERMINAL_BLOCKS%7F0607%7Fpdf%7FEnglish%7FENG_CS_1308389_EUROSTYLE_TERMINAL_BLOCKS_0607.pdf%7F282836-2, Dynamic Catalog=BuchananSeries, Family=TerminalBlocks-WiretoBoard, Featured Product=EurostyleTerminalBlockConnectors, Features=Interlocking(Side), Housing Material=Polyamide(PA66),Nylon6/6, Manufacturer URL=http://www.te.com, Mating Orientation=HorizontalwithBoard, Mounting Type=ThroughHole, Number of Levels=1, Other Names="5ULV-02B / A98076", Packaging=Bulk, Pitch="0.197\"(5.00mm)", Positions Per Level=2, Product Training Modules=Wire-to-BoardEurostyleTerminalBlocks, RoHS Information=282836-2StatementofCompliance, Screw Material - Plating=Brass-NickelPlated, Screw Thread=M3, Series=Buchanan, Torque - Screw=0.68Nm(6Lb-In), Wire Gauge=16-30AWG, Wire Termination=Screw-RisingCageClamp
J6 J7 J9 J10 J11 J12 J13 J14 J15 J16 J17 J18 J19 J20 J21 J22: library part CMP-2000-05183-2, "PC TEST POINT MINIATURE", Manufacturer=keystone, Automotive=No, Category=Conn, ComponentLink2Description=Datasheet, ComponentLink2URL=http://www.keyelco.com/product-pdf.cfm?p=1353, Conn Orientation=Straight, Contact Material=Silver, Device Class L1=Connectors, Device Class L2=unset, Device Class L3=unset, Digikey Description="PC TEST POINT MINIATURE", Height=1.65mm, Lead Free=Yes, Manufacturer Part Number=5015, Number of contacts=1, Octopart=https://octopart.com/5015-keystone-3822, Package=5015, RoHS=TRUE
P1: "Header, 10-Pin, Dual row", LatestRevisionDate=17-Jul-2002, LatestRevisionNote="Re-released for DXP Platform.", Publisher="Altium Limited"
Q1: library part CMP-02550-000167-1, "MOSFET P-CH 20V 35A 1212-8S", Continuous Drain Current=-22.1A, Drain To Source Breakdown Voltage=-20V, Drain To Source Resistance=0.0035Ω, Gate To Source Voltage=12V, Input Capacitace At Vds="5590pF @ -10V", Manufacturer=Vishay, Max Forward Diode Voltage=-1.1V, Max Junction Temp=+150°C, Package=S16-2667_SINGLE, Power Dissipation=3.7W, Pulse Drain Current=-80A, Temperature="-55°C to +150°C", Temperature Range Low=-55°C, Typ Forward Diode Voltage=-0.72V, Automotive=No, Category=Trans, ComponentLink2Description=Datasheet, ComponentLink2URL=http://www.vishay.com/docs/62667/si7615adn.pdf, Depletion Mode=False, Device Class L1="Discrete Semiconductors", Device Class L2=Transistors, Device Class L3=MOSFETs, Digikey Description="MOSFET P-CH 20V 35A 1212-8S", Drain To Source Voltage=-20V, Gate Charge At Vgs="122nC @ -10V", Height=1.12mm, Lead Free=Yes, Manufacturer Part Number=SI7615ADN-T1-GE3, Mouser Description="MOSFET -20V 4.4mOhm@10V 35A P-Ch G-III", Number Of Channels=1, Number Of P Channels=1, Octopart=https://octopart.com/si7615adn-t1-ge3-vishay-45331111, Reverse Recovery Charge=11nC, Reverse Recovery Time=27ns, RoHS=TRUE, Rthja Max=33°C/W, Standoff Height=0mm, Temperature Range High=+150°C, Threshold Vgs Max=-1.5V, Threshold Vgs Min=-0.4V, Transconductance=82S, Turn Off Delay Time=85ns, Turn On Delay Time=13ns
R1 R2A R2B R2C R3 R4A R4B R4C R5 R6 R7 R8 R9 R10 R11 R12 R13 R14 R15 R17 R18 R19 R22: library part "Resistor EU"
R20A R20B R20C R21A R21B R21C: library part CMP-05422-000060-1, "RES 0.22 OHM 1% 1W 2512", 3DS Part Number=110-00006, Manufacturer=Panasonic, Package=ERJ1TR, Power Rating=1W, Resistance=0.22Ω, Temperature="-55°C to +155°C", Temperature Coefficient=200ppm/°C, Temperature Range High=+155°C, Temperature Range Low=-55°C, Tolerance=1%, Automotive=Yes, Automotive Grade="Grade 0", Category=Res, ComponentLink2Description=Datasheet, ComponentLink2URL=https://industrial.panasonic.com/cdbs/www-data/pdf/RDN0000/AOA0000C313.pdf, Composition="Thick Film", Device Class L1="Passive Components", Device Class L2=Resistors, Device Class L3="Chip SMD Resistors", Digikey Description="RES 0.22 OHM 1% 1W 2512", Footprint Url=https://industrial.panasonic.com/cdbs/www-data/pdf/RDN0000/DMN0000COL17.pdf, Height=0.7mm, Ipc Land Pattern Name=RESC640320X60, Lead Free=Yes, Manufacturer Part Number=ERJ-1TRQFR22U, Mouser Description="Current Sense Resistors 2512 0.22ohm 1% Curr Sense AEC-Q200", Octopart=https://octopart.com/erj1trqfr22u-panasonic-10566390, RoHS=TRUE, Series=ERJ
U1 U4A U4B U4C: "No Description Available", Built_By=EMA_Jessica, Copyright="Copyright (C) 2016 Accelerated Designs. All rights reserved", RefDes=RefDes, SourceLibrary=Trinamic_2018-10-17, Type=DEV, Vendor=TRINAMIC
  U1: Manufacturer_Part_Number=TMC429-LI
  U4A U4B U4C: Manufacturer_Part_Number=TMC2660-PA
U2: library part CMP-07128-000008-1, "IC REG LINEAR 3.3V 1A DPAK", Ambient Temperature Range High=+125°C, Ambient Temperature Range Low=0°C, Dropout Voltage=1.2V, Manufacturer="ON Semiconductor", Max Junction Temp=+150°C, Max Supply Voltage=20V, Min Supply Voltage=2.4V, Nominal Supply Current=6mA, Output Current=1A, Output Voltage=3.3V, Package=369C, Temperature="-55°C to +150°C", Temperature Range Low=-55°C, Accuracy Percentage=1%, Automotive=No, Category=IC, ComponentLink2Description=Datasheet, ComponentLink2URL=https://www.onsemi.jp/PowerSolutions/document/NCP1117-D.PDF, Device Class L1="Integrated Circuits (ICs)", Device Class L2="Power Management ICs", Device Class L3="Voltage Regulators - Linear", Digikey Description="IC REG LINEAR 3.3V 1A DPAK", Footprint Url=https://www.onsemi.com/pub/Collateral/369C.PDF, Height=2.51mm, Lead Free=Yes, Manufacturer Part Number=NCP1117DT33G, Mouser Description="LDO Voltage Regulators 3.3V 1A Positive", Number Of Outputs=1, Octopart=https://octopart.com/ncp1117dt33g-on+semiconductor-1381653, Output Type=Fixed, RoHS=TRUE, Standoff Height=0mm, Temperature Range High=+150°C
U3: library part CMP-0243-00091-2, "ARM Cortex-M4 32-bit MCU+FPU, 105 DMIPS, 256 kB Flash, 64 kB Internal RAM, 48 I/Os, 64-pin LQFP, -40 to 85 degC, Tray", I/Os (High Current)=48, Manufacturer=STMicroelectronics, Operating Frequency(F) (Processor speed) (MHz)=84, Supply Voltage(Vcc) max (V)=3.6, Supply Voltage(Vcc) min (V)=1.8, ComponentLink1Description="Manufacturer URL", ComponentLink1URL=http://www.st.com/web/en/home.html, ComponentLink2Description=Datasheet, ComponentLink2URL=http://www.st.com/st-web-ui/static/active/en/resource/technical/document/data_brief/DM00071938.pdf, ComponentLink3Description="Package Specification", ComponentLink3URL=http://www.st.com/st-web-ui/static/active/en/resource/technical/document/datasheet/DM00037051.pdf, Core="ARM Cortex-M4", DatasheetVersion="Rev. 1", FLASH Size (Prog) (kB)=256, Internal RAM Size (kB)=64, Mounting Technology="Surface Mount", PackageDescription="64-Pin Low Profile Quad Flat Package, 10 x 10 mm Body, 0.5 mm Pitch", PackageReference=LQFP64, PackageVersion="Rev. 4, 06/2013", Packing=Tray, PartNumber=STM32F401RCT6
U5: library part CMP-04917-000022-1, "IC REG LINEAR 5V 1.5A SOT223-4", Dropout Voltage=2V, Manufacturer="Texas Instruments", Max Junction Temp=+150°C, Max Supply Voltage=30V, Min Supply Voltage=7.5V, Nominal Supply Current=8mA, Output Current=1.5A, Output Voltage=5V, Package=SOT223-4, Temperature="0°C to +125°C", Temperature Range High=+125°C, Temperature Range Low=0°C, Accuracy Percentage=3%, Automotive=No, Category=IC, ComponentLink2Description=Datasheet, ComponentLink2URL=http://www.ti.com/lit/ds/symlink/lm7800.pdf, Device Class L1="Integrated Circuits (ICs)", Device Class L2="Power Management ICs", Device Class L3="Voltage Regulators - Linear", Digikey Description="IC REG LINEAR 5V 1.5A SOT223-4", Height=1.8mm, Lead Free=Yes, Manufacturer Part Number=LM7805MPX/NOPB, Number Of Outputs=1, Octopart=https://octopart.com/lm7805mpx%2Fnopb-texas+instruments-74629992, Output Type=Fixed, RoHS=TRUE, Standoff Height=0.02mm
Y1 Y2A Y2B Y2C Y4: library part CMP-27762-000001-1, "XTAL OSC XO 16.0000MHZ HCMOS SMD", Frequency=16MHz, Load Capacitance=15pF, Manufacturer=Abracon, Max Supply Current=5mA, Max Supply Voltage=3.66V, Min Supply Voltage=2.97V, Package=ASA, Temperature="-40°C to +85°C", Temperature Range High=+85°C, Temperature Range Low=-40°C, Automotive=No, Category=Crys, ComponentLink2Description=Datasheet, ComponentLink2URL=https://abracon.com/Oscillators/ASA.pdf, Device Class L1="Passive Components", Device Class L2="Crystals / Oscillators", Device Class L3=Oscillators, Digikey Description="XTAL OSC XO 16.0000MHZ HCMOS SMD", Footprint Url=https://abracon.com/Support/PackageDrawing/Oscillators/ASA.PDF, Height=0.8mm, Lead Free=Yes, Manufacturer Part Number=ASA-16.000MHZ-L-T, Mouser Description="Standard Clock Oscillators 16.000MHz 3.3V -40C +85C", Octopart=https://octopart.com/asa-16.000mhz-l-t-abracon-21707822, RoHS=TRUE, Series=ASA, Stability=50ppm

## Free pads (board coordinates)
  round 6 hole 3 paste-1000 mask+0: 3(3.736,61.93) 4(42,12) 4(118,55)

## Via types
v1: diameter 0.5, hole 0.2, Top Layer to Bottom Layer, 880 vias

## Nets (pads, with @x,y where several pads share a name; then routed paths per layer and width w, separated by ;. In a path a pad name is that pad's centre, name@x,y a point inside that pad or via, vN(x,y) a via of type N, cw(c..) or ccw(c..) an arc to the next point about the centre after c; other vN are vias at no path point)
+3v3: C1.2 C2.2 C4.2 C5A.2 C5B.2 C5C.2 C8.2 C9.2 C10.2 C11.2 C12.2 C13.2 C14.2 C21.2 C22.2 C27A.2 C27B.2 C27C.2 C28A.2 C28B.2 C28C.2 C31.2 C33.2 C34.2 J3.9 P1.1 P1.2 R1.2 R3.1 R5.1 R13.2 R15.1 R17.1 R19.1 R22.1 U1.3 U1.21 U1.22 U2.4 U3.1 U3.13 U3.19 U3.32 U3.48 U3.64 U4A.40 U4B.40 U4C.40 Y1.1 Y1.4 Y2A.1 Y2A.4 Y2B.1 Y2B.4 Y2C.1 Y2C.4 Y4.1 Y4.4 | length 43.2
  Top Layer w0.254: C28A.2@14.732,47.944 15.036,47.64 16.398,47.64 Y2A.1@16.51,47.752 ; Y2A.1@16.557,47.64 17.384,47.64 Y2A.4@17.526,47.498 ; C2.2@54.2,55.28 54.25,55.28 54.623,55.653 54.623,55.703 55.955,57.035 U1.3@55.955,57.857 ; C34.2@55.2,65 55.25,65 56.449,63.801 56.449,63.679 ; C28B.2@55.849,47.893 55.849,47.843 C28B.2@56.222,47.47 ; U1.21@56.454,62.836 56.454,63.796 ; Y2B.1@57.5,47 57.632,47.132 Y2B.1@57.674,47.132 Y2B.4@58.674,47.132 58.674,48.126 ; 57.9,53.521 57.888,53.533 57.888,54.388 Y1.4@57.875,54.4 58.8,54.4 Y1.1@58.9,54.3 ; C4.2@60.9,54.4 C4.2@61.2,54.7 ; C31.2@69.099,60.452 C31.2@69.149,60.452 ; 70.454,61.757 Y4.1@71.459,61.757 ; Y4.1@71.548,61.828 71.619,61.757 Y4.1@71.657,61.757 Y4.4@72.657,61.757 ; C22.2@71.882,55.234 73.766,55.234 C21.2@73.922,55.078 ; C12.2@74,64 74.05,64 C12.2@74.423,63.627 ; C21.2@74.1,55.4 C21.2@74.1,55.412 ; 75.105,56.416 U3.13@76.416,56.416 ; U3.13@76.4,56.4 U3.13@76.416,56.416 ; C10.2@77.234,66.853 77.234,65.83 78.261,64.803 78.513,64.803 78.534,64.782 U3.64@78.534,64.266 ; C13.2@79.132,50.292 79.161,50.292 79.534,50.665 U3.19@79.534,53.066 79.534,54.634 80,55.1 80,56 79.584,56.416 U3.13@76.684,56.416 U3.13@76.416,56.416 ; U3.32@86.034,53.066 86.034,53.797 86.055,53.818 90.418,53.818 C11.2@90.7,54.1 ; C28C.2@96.774,47.498 97.147,47.125 97.675,47.125 98.652,46.148 98.652,45.798 Y2C.1@98.8,45.65 ; Y2C.1@98.825,45.625 98.85,45.65 Y2C.4@99.8,45.65
+5: C35.2 J8.2 U5.3 | length 33.8
  Top Layer w0.5: J8.2@13.3,70.4 13.3,73.747 14.453,74.9 36.45,74.9 38.35,76.8 C35.2@38.4,76.8 ; C35.2@38.3,76.9 38.35,76.9 40.6,74.65 U5.3@40.6,73.8
+12: C3A.1 C3B.1 C3C.1 C7.2 C19.2 C23A.1 C23B.1 C23C.1 C24A.1 C24B.1 C24C.1 C25A.1 C25B.1 C25C.1 C26A.1 C26B.1 C26C.1 Q1.1 Q1.2 Q1.3 U2.3 U4A.1 U4A.4 U4A.30 U4A.33 U4A.36 U4B.1 U4B.4 U4B.30 U4B.33 U4B.36 U4C.1 U4C.4 U4C.30 U4C.33 U4C.36 U5.1 | length 18.6
  Top Layer w0.254: v1(40.633,67.981) 40.633,69.167 U5.1@40.6,69.2 43.3,69.2 43.5,69 C19.2@43.5,69.4
  Top Layer w0.5: C3A.1@15.849,27.838 15.849,25.513 C24A.1@15.864,25.498 C25A.1@15.864,23.194 ; C3B.1@56.794,27.787 56.794,25.462 C24B.1@56.809,25.448 C25B.1@56.809,23.143 ; C3C.1@97.993,27.635 97.993,25.31 C24C.1@98.008,25.295 C25C.1@98.008,22.991
  other v1: 2,22 3,22 4,22 5,22 6,22 7,22 35,22 36,22 37,22 38,22 39,22 44,22 45,22 46,22 47,22 48,22 76,22 77,22 78,22 79,22 80,22 81,22 85,22 86,22 87,22 88,22 89,22 117,22 118,22 119,22 120,22 121,22 122,22 2,23 3,23 4,23 5,23 6,23 7,23 35,23 36,23 37,23 38,23 39,23 44,23 45,23 46,23 47,23 48,23 76,23 77,23 78,23 79,23 80,23 81,23 85,23 86,23 87,23 88,23 89,23 117,23 118,23 119,23 120,23 121,23 122,23 2,24 3,24 4,24 5,24 6,24 7,24 76,24 77,24 78,24 79,24 80,24 81,24 85,24 86,24 87,24 88,24 89,24 117,24 118,24 119,24 120,24 121,24 122,24 2,25 3,25 4,25 5,25 6,25 7,25 37,25 38,25 39,25 44,25 45,25 46,25 122,25 44,26 79,26 80,26 81,26 85,26 86,26 117,26 118,26 119,26 120,26 121,26 122,26 3,27 4,27 5,27 6,27 7,27 37,27 38,27 45,27 46,27 79,27 81,27 117,27 118,27 119,27 120,27 121,27 122,27 3,28 4,28 5,28 6,28 7,28 37,28 38,28 39,28 44,28 45,28 46,28 79,28 80,28 86,28 117,28 118,28 119,28 120,28 121,28 122,28 35,29 36,29 37,29 38,29 39,29 44,29 45,29 46,29 47,29 48,29 79,29 80,29 85,29 86,29 35,30 36,30 37,30 38,30 39,30 44,30 45,30 46,30 47,30 48,30 76,30 77,30 78,30 79,30 80,30 85,30 86,30 87,30 88,30 89,30 35,31 36,31 37,31 38,31 39,31 44,31 45,31 46,31 47,31 48,31 76,31 77,31 78,31 79,31 80,31 85,31 86,31 87,31 88,31 89,31 62,68 63,68 64,68 65,68 66,68 67,68 68,68 69,68 70,68 71,68 72,68 62,69 63,69 64,69 65,69 66,69 67,69 68,69 69,69 70,69 71,69 72,69 62,70 63,70 64,70 65,70 66,70 67,70 68,70 69,70 70,70 71,70 72,70 68,73 69,73 70,73 72,73 64,74 68,74 69,74 70,74 72,74 64,75 72,75 64,76 65,76 72,76
"CHA A": C18.2 J11.1 R8.2 U3.37 | length 68.1
  Top Layer w0.254: J11.1@40.7,62.925 44.253,66.478 44.253,66.553 v1(44.3,66.6) ; v1(82.913,57.559) 82.913,57.551 83.548,56.916 U3.37@87.884,56.916
  Top Layer w0.5: R8.2@26.1,62.1 C18.2@28.3,62.1 39.9,62.1 J11.1@40.4,62.6 ; J11.1@40.4,61.8 J11.1@40.4,62.6 ; J11.1@40.4,62.625 J11.1@40.4,62.6
  Bottom Layer w0.254: v1(44.3,66.6) 44.365,66.6 44.527,66.438 62.756,66.438 64.591,64.603 75.877,64.603 82.913,57.567 v1(82.913,57.559)
"CHA B": C36.2 J12.1 R11.2 U3.36 | length 75.6
  Top Layer w0.254: J12.1@43.3,62 43.3,62.325 45.475,64.5 v1(45.5,64.5) ; v1(82.593,56.42) 82.595,56.418 87.972,56.418 U3.36@87.979,56.412
  Top Layer w0.5: R11.2@20.2,57.6 22.6,57.6 C36.2@22.7,57.5 ; C36.2@22.7,57.6 22.7,57.65 23.073,58.023 23.123,58.023 23.9,58.8 41.425,58.8 J12.1@43.825,61.2
  Bottom Layer w0.254: v1(45.5,64.5) 46.831,65.831 62.169,65.831 64.776,63.224 75.808,63.224 82.593,56.439 v1(82.593,56.42)
CS_ALTITUDE: J13.1 U3.16 U4B.18 | length 38.2
  Top Layer w0.254: J13.1@48.799,49.015 49.009,49.225 59.433,49.225 60.979,47.679 ; U4B.18@60.979,41.433 60.979,47.679 ; v1(65.4,49.9) 63.2,49.9 60.979,47.679 ; v1(72.5,50) 76.6,54.1 U3.16@76.6,54.9
  Bottom Layer w0.254: v1(65.4,49.9) 72.333,49.9 72.433,50 v1(72.5,50)
CS_AZIMUTH: J14.1 U3.52 U4A.18 | length 106
  Top Layer w0.254: J14.1@7.801,57.6 12.4,57.6 15.432,54.568 v1(22.883,54.568) ; v1(19.588,43.512) 20.034,43.066 U4A.18@20.034,41.483 ; U3.52@84.534,64.735 84.534,68.734 v1(85,69.2)
  Bottom Layer w0.254: v1(19.588,43.512) 19.588,51.188 v1@22.926,54.526 ; v1(22.883,54.568) 22.922,54.568 40.253,71.9 82.3,71.9 v1(85,69.2)
CS_CTRL: J15.1 U1.7 U3.2 | length 23.2
  Top Layer w0.254: U1.7@57.954,57.94 57.954,57.263 58.317,56.9 58.969,56.9 v1(59,56.869) ; v1(60.806,62) 61.306,62.5 J15.1@63.5,62.5 ; J15.1@64.5,62.5 64.554,62.446 v1(66.739,62.446) ; v1(74.291,61.915) 74.3,61.925 76.675,61.925 U3.2@76.684,61.916
  Bottom Layer w0.254: v1(59,56.869) 59,60.268 60.769,62.037 v1(60.806,62) ; v1(66.739,62.446) 67.269,61.915 v1(74.291,61.915)
CS_POL: J22.1 U3.58 U4C.18 | length 56.8
  Top Layer w0.254: U3.58@81.534,64.266 81.534,61.566 v1(81.543,61.556) ; v1(100.536,53.112) 100.568,53.08 113.095,53.08 116.175,50 J22.1@117,50 ; v1(101,47) 102.178,45.822 U4C.18@102.178,41.28 ; J22.1@117.918,50.082 J22.1@118,50
  Bottom Layer w0.254: v1(81.543,61.556) 82.2,60.9 94.759,60.9 100.568,55.092 100.568,53.144 v1(100.536,53.112) 100.536,47.464 v1(101,47)
DIR1: J16.1 U1.17 U4A.41 | length 84.8
  Top Layer w0.254: J16.1@7.9,54 26,54 v1(26.6,54.6) ; v1(20.828,34.036) 20.828,32.472 22.434,30.866 U4A.41@22.434,29.926 ; U1.17@58.454,62.836 58.454,63.163 58.813,63.521 58.966,63.521 v1(59.444,63.521)
  Bottom Layer w0.254: v1(20.828,34.036) 20.828,40.828 21.7,41.7 21.7,49.7 v1(26.6,54.6) 35.7,63.7 47.241,63.7 47.425,63.516 59.438,63.516 v1(59.444,63.521)
DIR2: J17.1 U1.27 U4C.41 | length 101.3
  Top Layer w0.254: v1(51.5,67) 51.5,63.4 53.762,61.138 U1.27@54.256,61.138 ; v1(102.464,51.986) 109.189,51.986 111.175,50 J17.1@112,50 ; v1(102.918,32.411) 104.578,30.751 U4C.41@104.578,29.723
  Bottom Layer w0.254: v1(51.5,67) 51.505,67.005 63.329,67.005 65.04,65.294 94.806,65.294 102.464,57.636 v1(102.464,51.986) ; v1@102.462,51.985 102.462,41.94 102.921,41.481 102.921,32.414 v1(102.918,32.411)
DIR3: J18.1 U1.20 U4B.41 | length 60.6
  Top Layer w0.254: J18.1@46.634,55.334 46.634,53.215 46.702,53.148 v1(46.702,53.081) ; v1(56.598,64.555) 56.954,64.199 U1.20@56.954,62.836 ; v1@61.642,32.547 63.379,30.81 U4B.41@63.379,29.876
  Bottom Layer w0.254: v1(46.702,53.081) 49.833,49.95 49.833,49.784 52.917,46.7 60.3,46.7 ; v1(56.598,64.555) 59.345,64.555 61.519,62.381 61.519,56.967 60.585,56.034 60.585,46.985 60.3,46.7 ; v1(61.642,32.564) 61.642,38.058 60.6,39.1 60.6,46.4 60.3,46.7
ENN_ALT: U3.17 U4B.19 | length 26.5
  Top Layer w0.254: U4B.19@60.179,41.433 60.179,40.435 60.364,40.25 67.223,40.25 67.473,40.5 v1(67.5,40.5) ; v1(74,50) 77,53 78.513,53 78.513,53.045 U3.17@78.534,53.066
  Bottom Layer w0.254: v1(67.5,40.5) 72.498,45.498 72.498,48.498 v1(74,50)
ENN_AZI: U3.51 U4A.19 | length 93.5
  Top Layer w0.254: v1(18.6,43.5) 19.234,42.866 U4A.19@19.234,41.483 ; U3.51@85.034,64.097 U3.51@85.036,64.096 ; U3.51@85.034,64.266 85.034,68.138 v1(86.06,69.164)
  Bottom Layer w0.254: v1(18.6,43.5) 18.6,51.915 39.285,72.6 82.624,72.6 v1(86.06,69.164)
ENN_POL: U3.59 U4C.19 | length 37.8
  Top Layer w0.254: v1(80.99,60.898) 81.025,60.933 81.025,63.508 U3.59@81.034,63.517 ; v1(99.6,47) 100,47 101.378,45.622 U4C.19@101.378,41.28
  Bottom Layer w0.254: v1(80.99,60.898) 81.788,60.1 93.5,60.1 99.6,54 v1(99.6,47)